# Altium PCB mini-dvm.PcbDoc
Units mil, origin at the board's own origin, x right, y up, seen from the top; angles counter-clockwise.
Board outline 1000 x 1000 mil, 4 copper layers (Top CMP/GND, Top SIG/PWR, Bottom SIG/PWR, Bottom CMP/GND), stack 29.2 mil thick; 60 components, 58 nets, 268 pads, 110 vias.
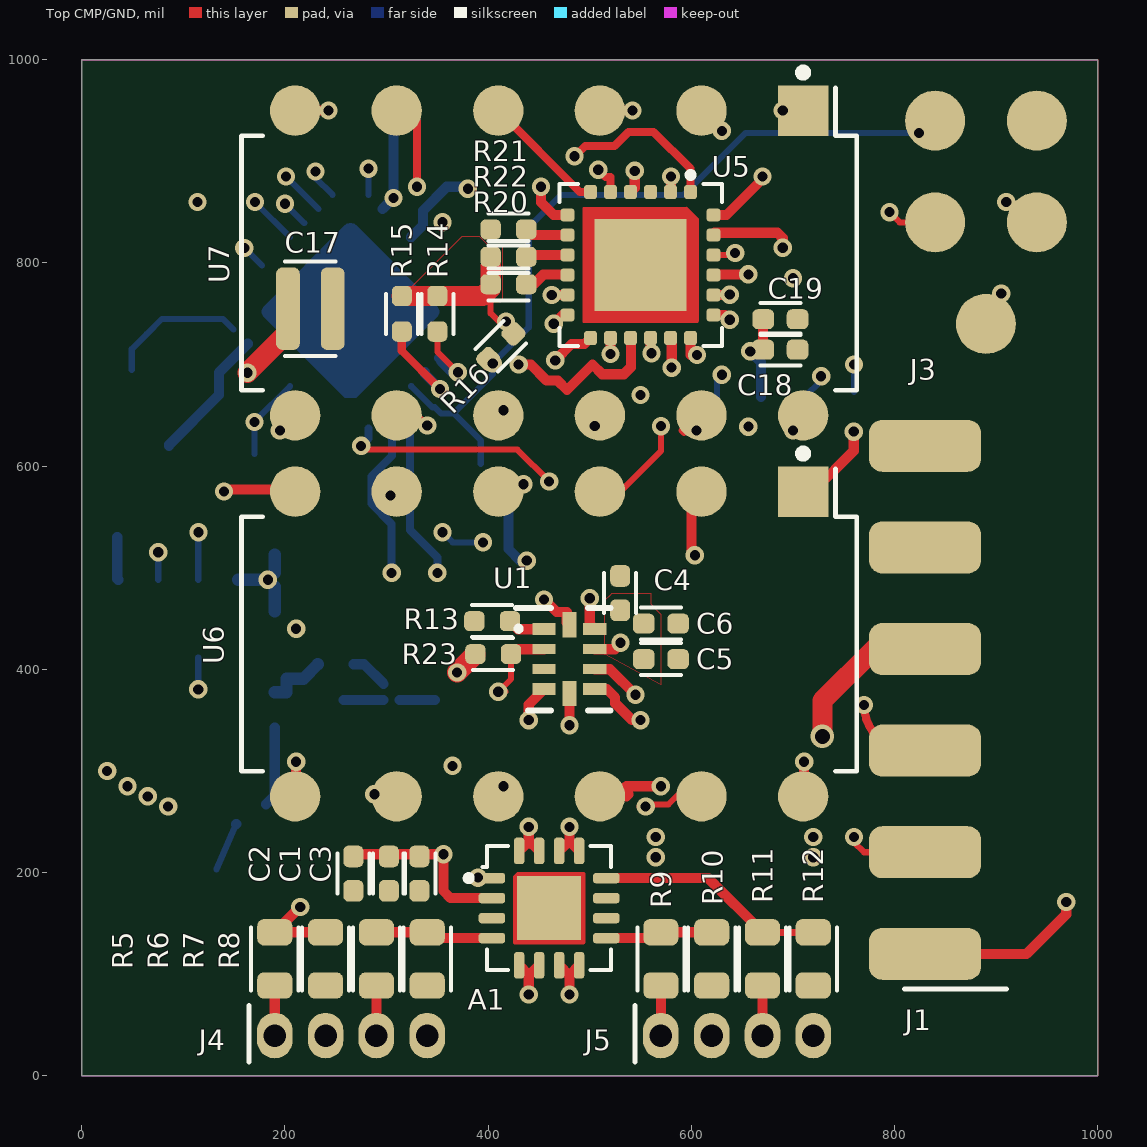
[diagram p0: Top CMP/GND view]
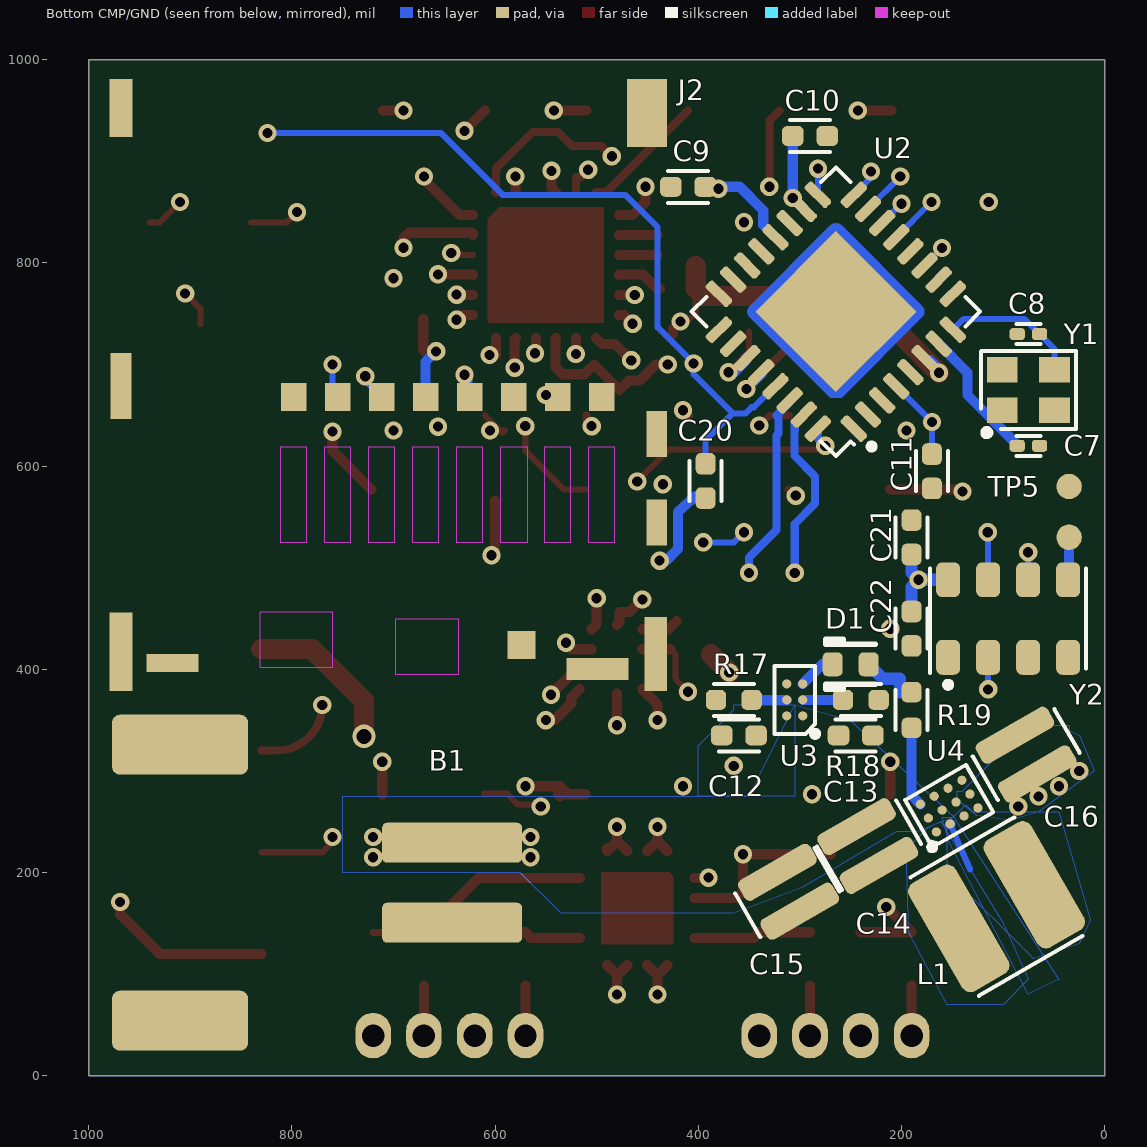
[diagram p1: Bottom CMP/GND view, seen from below]
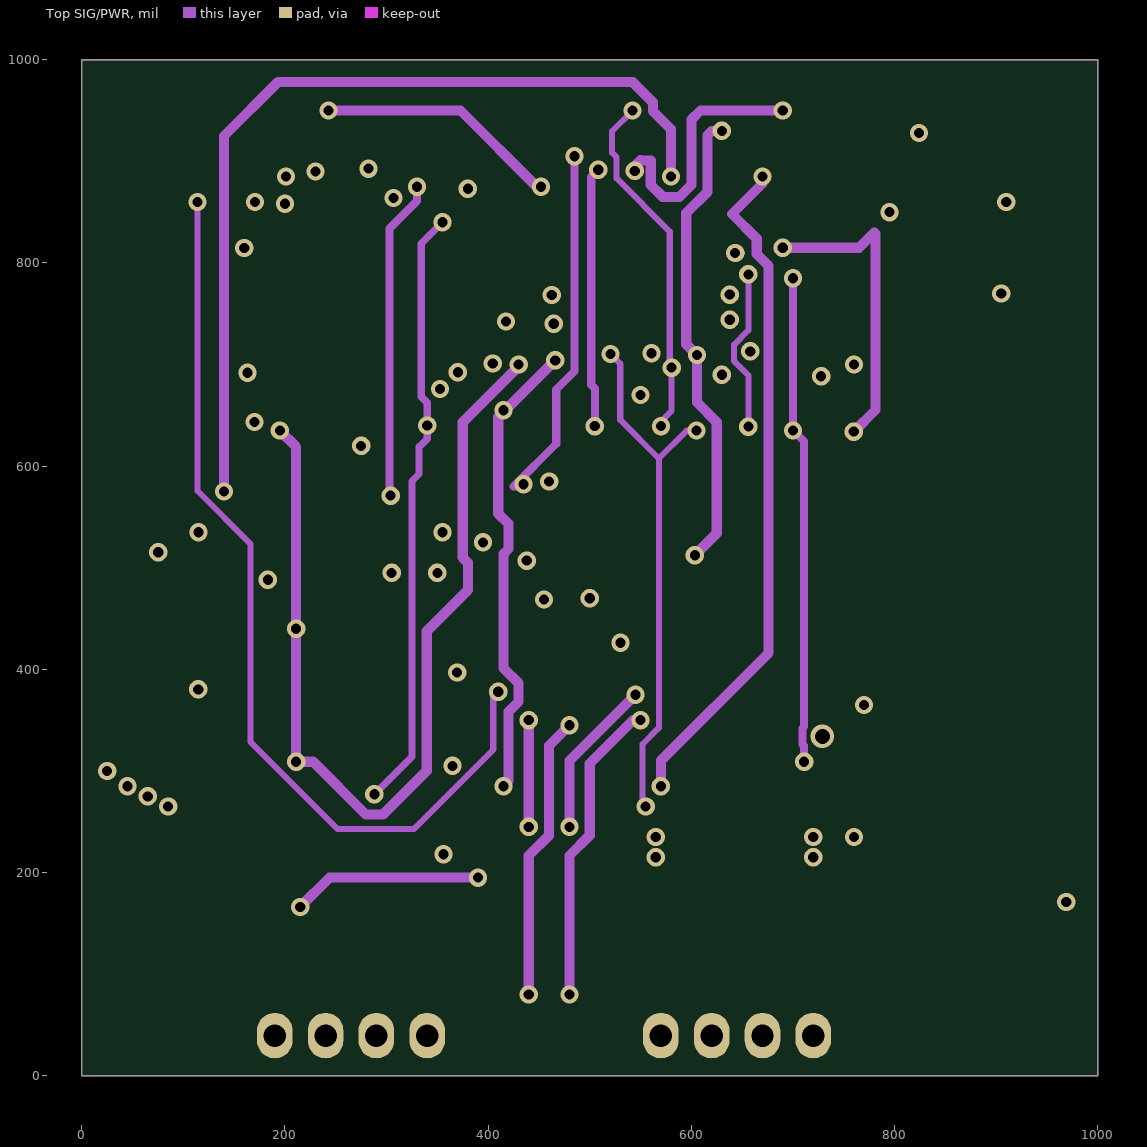
[diagram p2: Top SIG/PWR]
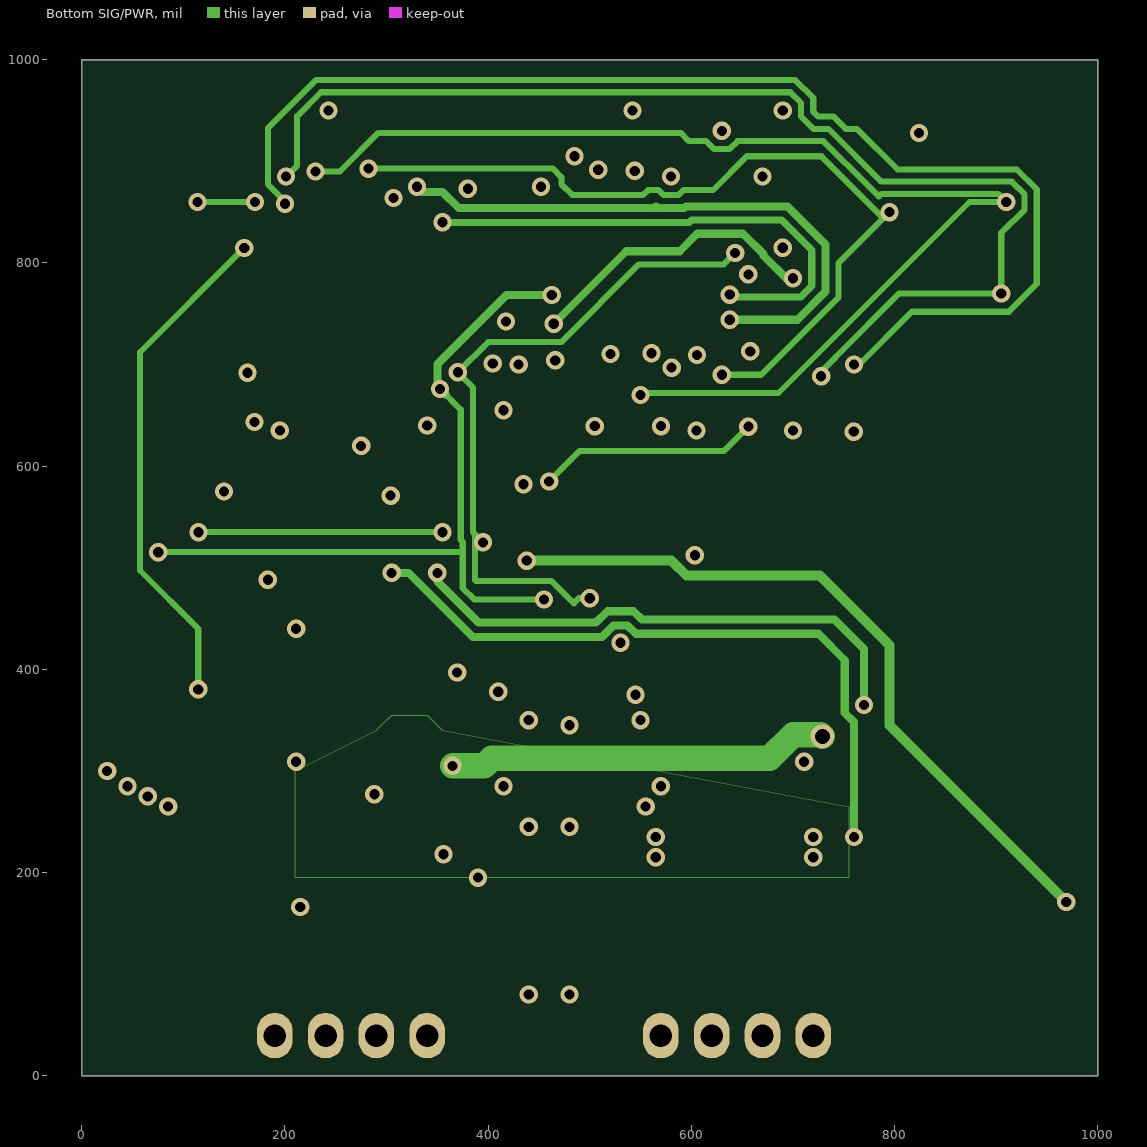
[diagram p3: Bottom SIG/PWR]

## Layer stack, top to bottom
Top Solder: solder mask 1, Solder Resist, Dk 3.5
Top CMP/GND: signal copper 1.4
Dielectric 1: core 10, FR-408, Dk 3.66
Top SIG/PWR: signal copper 0.7
Dielectric 2: prepreg 5, FR-408, Dk 3.66
Bottom SIG/PWR: signal copper 0.7
Dielectric 3: core 10, FR-408, Dk 3.66
Bottom CMP/GND: signal copper 1.4
Bottom Solder: solder mask 1, Solder Resist, Dk 3.5

## Board outline
0,0 0,1000 1000,1000 1000,0

## Design rules (kind name [scope] priority, off if disabled: settings)
Clearance PowerPolyConnect [(InNet('VBAT') OR InNet('VCC3V3') OR InNet('VCC5VUSB') OR InNet('GND'))] p1: gap=4 // Polygon Connect Style for Power Pours
Clearance [All] p2: gap=6
ComponentClearance [All] p1: gap=6 collisioncheckmode=3 verticalgap=0 showdistances=FALSE
MinimumSolderMaskSliver [All] p1: minsoldermaskwidth=3
PlaneClearance [All] p1: clearance=10
PlaneConnect [All] p1: planeconnectstyle=Relief reliefexpansion=20 reliefentries=4 reliefconductorwidth=12 reliefairgap=5
PolygonConnect [All] p1: connectstyle=Direct reliefconductorwidth=12 reliefentries=4 polygonreliefangle="90 Angle" airgapwidth=5
RoutingVias [All] p1: holewidth=10 width=18 viastyle="Through Hole" minholewidth=10 minwidth=18 maxholewidth=28 maxwidth=50
SilkToSolderMaskClearance [IsPad] p1 off: minsilkscreentomaskgap=10 clearancetoexposedcopper=TRUE
SolderMaskExpansion [All] p1: expansion=2.5
Width [All] p1: maxlimit=100 minlimit=6 preferedwidth=12 minimp=50.000000 maximp=50.000000 favimp=50.000000
25 further rules are at their usual default settings.

## Components (designator, comment, footprint, x,y, rotation, side; value= is the part's Value field where it differs from the comment)
A1 "TSU104" QFN50P300X300X100-17T180X180L 460,165 r270 top
B1 "Battery" S2B-PH-SM4 780,190 r90 bottom
C1 "10000pF" CAPC1005X50L25N 302.28,198.9 r270 top
C2 "10000pF" CAPC1005X50L25N 267.28,198.9 r270 top
C3 "0.1µF" CAPC1005X50L25N 332.28,198.9 r270 top
C4 "0.1µF" CAPC1005X50L25N 530,475 r90 top
C5 "0.1µF" CAPC1005X50L25N 570,410 r0 top
C6 "10000pF" CAPC1005X50L25N 570,445 r0 top
C7 "15pF" CAPC0603X33L15L 75,620 r180 bottom
C8 "15pF" CAPC0603X33L15L 75,730 r0 bottom
C9 "0.1µF" CAPC1005X50L25N 410,875 r0 bottom
C10 "10000pF" CAPC1005X50L25N 290,925 r180 bottom
C11 "10000pF" CAPC1005X50L25N 170,595 r270 bottom
C12 "1µF" CAPC1005X50L25N 360,335 r0 bottom
C13 "1µF" CAPC1005X50L25N 245,335 r180 bottom
C14 "10µF" CAPC1220X95L30L 233.14,226.12 r240 bottom
C15 "10µF" CAPC1220X95L30L 311.09,181.12 r240 bottom
C16 "10µF" CAPC1220X95L30L 77.26,316.12 r60 bottom
C17 "10µF" CAPC1220X95L30L 225,755 r0 top
C18 "1µF" CAPC1005X50L25N 687.57,714.62 r0 top
C19 "0.1µF" CAPC1005X50L25N 687.57,744.62 r0 top
C20 "0.1µF" CAPC1005X50L25N 392.74,585.47 r90 bottom
C21 "1µF" CAPC1005X50L25N 190,530 r90 bottom
C22 "0.1µF" CAPC1005X50L25N 190,440 r270 bottom
D1 "Green LED" SML-P11Mxxx 250,405 r180 bottom
J1 "Manufacturer Part Number 1" HEADER_6_SMT_RA 930,370 r270 top
J2 "microSD_ST11" microSD_ST11-H 705,680 r0 bottom
J3 "POGO_SPI" POGO_SPI 890,890 r0 top
J4 "Manufacturer Part Number 1" HEADER_4_RA 265,-15 r180 top
J5 "Manufacturer Part Number 1" HEADER_4_RA 645,-15 r180 top
L1 "1.5µH" INDC3030X30L90L 106.36,166.52 r150 bottom
R5 "9.09M" RESC1508X50L30L 190,115 r270 top
R6 "910k" RESC1508X50L30L 240,115 r90 top
R7 "9.09M" RESC1508X50L30L 290,115 r270 top
R8 "910k" RESC1508X50L30L 340,115 r90 top
R9 "9.09M" RESC1508X50L30L 570,115 r270 top
R10 "910k" RESC1508X50L30L 620,115 r90 top
R11 "9.09M" RESC1508X50L30L 670,115 r270 top
R12 "910k" RESC1508X50L30L 720,115 r90 top
R13 "10k" RESC1005X40L25N 403.94,447.4 r0 top
R14 "10k" RESC1005X40L25N 350,750 r90 top
R15 "10k" RESC1005X40L25N 315,750 r90 top
R16 "10k" RESC1005X40L25N 412.41,718 r45 top
R17 "680" RESC1005X40L25N 365,370 r180 bottom
R18 "10k" RESC1005X40L25N 240,370 r0 bottom
R19 "2.32k" RESC1005X40L25N 190,360 r270 bottom
R20 "75k" RESC1005X40L25N 420,779 r180 top
R21 "10k" RESC1005X40L25N 420,833 r0 top
R22 "10k" RESC1005X40L25N 420,806 r180 top
R23 "10k" RESC1005X40L25N 405,415 r180 top
TP5 "TPwGND" TPwGND 35,555 r0 bottom
U1 "ADS1115" X2QFN-10 480,410 r0 top
U2 "ATMEGA328P_32MLF" QFN50P500X500X100-33T325X325L 264.52,752 r135 bottom
U3 "bq2510xx" BGA6C40P3X2_157X88X50B23L 305,370 r90 bottom
U4 "TPS6305x" BGA12C40P4X3_168X128X62B25L 153.07,265.42 r150 bottom
U5 "AS1117" PQFN50P400X400X60-25T290X290L 550,798 r180 top
U6 "QDSP-6064" DIP762W51P254L1537H483Q12_SMT 460,425 r180 top
U7 "QDSP-6064" DIP762W51P254L1537H483Q12_SMT 460,800 r180 top
Y1 "ABM11" XTALDFN200X160X59-4L 75,675 r180 bottom
Y2 "AB-RTCMK-32" SON100P320X250X100-8L 95,450 r180 bottom

## Footprints (in the part's own frame and the unit in brackets; to place one, negate y for a bottom-side part, rotate by r counter-clockwise, add the part's x,y. Pads: shape width x height; smd on the part's side, far side on the other; paste and mask are expansions set on the pad)
BGA6C40P3X2_157X88X50B23L [mm] "Ball Grid Array (BGA), 0.40 mm pitch, rect.; 6 pin, 1.578 mm L X 0.88 mm W X 0.50 mm H body"
  round 0.23 smd mask+0.03: A1(-0.4,-0.2) A2(-0.4,0.2) B1(0,-0.2) B2(0,0.2) C1(0.4,-0.2) C2(0.4,0.2)
  silkscreen extent -0.92,-0.58 0.85,0.51, body extent -0.79,-0.44 0.79,0.44, height 0.5
BGA12C40P4X3_168X128X62B25L [mm] "Ball Grid Array (BGA), 0.40 mm pitch, rect.; 12 pin, 1.686 mm L X 1.286 mm W X 0.625 mm H body"
  round 0.23 smd mask+0.03: A1(-0.6,-0.4) A2(-0.6,0) A3(-0.6,0.4) B1(-0.2,-0.4) B2(-0.2,0) B3(-0.2,0.4) C1(0.2,-0.4) C2(0.2,0) C3(0.2,0.4) D1(0.6,-0.4) D2(0.6,0) D3(0.6,0.4)
  silkscreen extent -0.95,-0.75 0.88,0.68, body extent -0.84,-0.64 0.84,0.64, height 0.63
CAPC0603X33L15L [mm] "Capacitor, Chip; 0.60 mm L X 0.30 mm W X 0.33 mm H body"
  rrect53% 0.38x0.3 smd mask+0.05: 1(-0.28,0) 2(0.28,0)
  silkscreen extent -0.3,-0.25 0.3,0.25
CAPC1005X50L25N [mm] "Capacitor, Chip; 1.00 mm L X 0.50 mm W X 0.50 mm H body"
  rrect52% 0.54x0.5 smd: 1(-0.43,0) 2(0.43,0)
  silkscreen extent -0.5,-0.4 0.5,0.4, body extent -0.51,-0.25 0.51,0.25, height 0.5
CAPC1220X95L30L [mm] "Capacitor, Chip; 1.25 mm L X 2.00 mm W X 0.95 mm H body"
  rrect51% 0.59x2.06 smd: 1(-0.56,0) 2(0.56,0)
  silkscreen extent -0.63,-1.18 0.63,1.18, body extent -0.63,-1 0.64,1, height 0.6
DIP762W51P254L1537H483Q12_SMT [mm] "DIP, 7.62 mm lead span, 2.54 mm pitch; 12 pin, 15.37 mm L X 6.35 mm W X 4.83 mm H body"
  rect 1.26x1.26 smd paste-1.26: 1(-6.35,-3.81)
  round 1.26 smd paste-1.26: 2(-3.81,-3.81) 3(-1.27,-3.81) 4(1.27,-3.81) 5(3.81,-3.81) 6(6.35,-3.81) 7(6.35,3.81) 8(3.81,3.81) 9(1.27,3.81) 10(-1.27,3.81) 11(-3.81,3.81) 12(-6.35,3.81)
  silkscreen extent -7.69,-4.86 7.69,3.18
HEADER_4_RA [mm]
  oval 0.89x1.14 hole 0.56: 1(1.905,-1.385) 2(0.635,-1.385) 3(-0.635,-1.385) 4(-1.905,-1.385)
  silkscreen extent 2.55,-2.14 2.55,-0.72, body extent -3.12,-1.63 3.12,4.5, height 3.02
HEADER_6_SMT_RA [mm]
  rrect50% 1.3x2.8 smd: 1(6.35,-2.54) 2(3.81,-2.54) 3(1.27,-2.54) 4(-1.27,-2.54) 5(-3.81,-2.54) 6(-6.35,-2.54)
  silkscreen extent 7.22,-3.05 7.22,-0.51, body extent -7.62,-3.47 7.62,7.63, height 2.5
INDC3030X30L90L [mm] "Inductor, Chip; 3.00 mm L X 3.00 mm W X 0.30 mm H body"
  rrect37% 1.34x3.12 smd: 1(-1.09,0) 2(1.09,0)
  silkscreen extent -1.5,-1.71 1.5,1.71, body extent -1.5,-1.5 1.5,1.5, height 1.4
microSD_ST11-H [mm]
  rect 0.64x0.7 smd: 1(2.37,0.3) 2(1.27,0.3) 3(0.17,0.3) 4(-0.93,0.3) 5(-2.03,0.3) 6(-3.13,0.3) 7(-4.23,0.3) 8(-5.33,0.3)
  rect 1.55x0.55 smd: 9(-5.225,7.102)
  rect 0.7x0.7 smd: 10(-3.33,6.5)
  rect 0.57x1.45 smd: 11(6.685,-6.925)
  rect 0.52x1.65 smd: 12(6.685,0.03)
  rect 0.57x1.96 smd: 13(6.685,6.67)
  rect 0.57x1.85 smd: 14(-6.685,6.725)
  rect 0.52x1.15 smd: 15(-6.71,3.44) 16(-6.71,1.23)
  rect 1.01x1.7 smd: 17(-6.465,-6.8)
  rect 1.3x0.45 smd: 18(5.4,6.955)
  Top CMP/GND keep-out region: -1.75,7.25 -0.19,7.25 -0.19,5.85 -1.75,5.85
  Top CMP/GND keep-out region: 1.4,7.07 3.2,7.07 3.2,5.67 1.4,5.67
  Top CMP/GND keep-out region: -5.65,3.95 -5.01,3.95 -5.01,1.55 -5.65,1.55
  Top CMP/GND keep-out region: -4.55,3.95 -3.91,3.95 -3.91,1.55 -4.55,1.55
  Top CMP/GND keep-out region: -3.475,3.95 -2.81,3.95 -2.81,1.55 -3.475,1.55
  Top CMP/GND keep-out region: -0.15,3.95 0.49,3.95 0.49,1.55 -0.15,1.55
  Top CMP/GND keep-out region: -2.35,3.95 -1.71,3.95 -1.71,1.55 -2.35,1.55
  Top CMP/GND keep-out region: -1.25,3.95 -0.61,3.95 -0.61,1.55 -1.25,1.55
  Top CMP/GND keep-out region: 0.95,3.95 1.59,3.95 1.59,1.55 0.95,1.55
  Top CMP/GND keep-out region: 2.05,3.95 2.69,3.95 2.69,1.55 2.05,1.55
  body extent -6.7,-7.65 6.7,7.65, height 1.22
POGO_SPI [mm]
  round 1.5 smd: 1(-1.27,1.27) 2(-1.27,-1.27) 3(0,-3.81) 4(1.27,-1.27) 5(1.27,1.27)
PQFN50P400X400X60-25T290X290L [mm] "Pullback Quad Flat No-Lead (PQFN with Tab), 0.50 mm pitch; square, 6 pin X 6 pin, 4.00 mm L X 4.00 mm W X 0.60 mm H body"
  rrect48% 0.33x0.35 smd: 1(-1.25,-1.825) 2(-0.75,-1.825) 3(-0.25,-1.825) 4(0.25,-1.825) 5(0.75,-1.825) 6(1.25,-1.825) 13(1.25,1.825) 14(0.75,1.825) 15(0.25,1.825) 16(-0.25,1.825) 17(-0.75,1.825) 18(-1.25,1.825)
  rrect48% 0.35x0.33 smd: 7(1.825,-1.25) 8(1.825,-0.75) 9(1.825,-0.25) 10(1.825,0.25) 11(1.825,0.75) 12(1.825,1.25) 19(-1.825,1.25) 20(-1.825,0.75) 21(-1.825,0.25) 22(-1.825,-0.25) 23(-1.825,-0.75) 24(-1.825,-1.25)
  rect 2.3x2.3 smd paste-2.3 mask+0: 25(0,0)
  Top CMP/GND region: 1.45,0 1.45,-1.4 1.449,-1.408 1.448,-1.415 1.445,-1.423 1.441,-1.429 1.435,-1.435 1.429,-1.441 1.423,-1.445 1.415,-1.448 1.408,-1.449 -1.15,-1.45 -1.45,-1.15 -1.45,1.4 -1.449,1.408 -1.448,1.415 -1.445,1.423 -1.441,1.429 -1.435,1.435 -1.429,1.441 -1.423,1.445 -1.415,1.448 -1.408,1.449 1.4,1.45 1.408,1.449 1.415,1.448 1.423,1.445 1.429,1.441 1.435,1.435 1.441,1.429 1.445,1.423 1.448,1.415 1.449,1.408 1.45,1.4 1.45,0
  silkscreen extent -2.03,-2.32 2.03,2.03, body extent -2,-2 2,2, height 0.9
QFN50P300X300X100-17T180X180L [mm] "Quad Flat No-Lead (QFN with Tab), 0.50 mm pitch; square, 4 pin X 4 pin, 3.00 mm L X 3.00 mm W X 1.00 mm H body"
  rrect54% 0.26x0.66 smd: 1(-0.75,-1.43) 2(-0.25,-1.43) 3(0.25,-1.43) 4(0.75,-1.43) 9(0.75,1.43) 10(0.25,1.43) 11(-0.25,1.43) 12(-0.75,1.43)
  rrect54% 0.66x0.26 smd: 5(1.43,-0.75) 6(1.43,-0.25) 7(1.43,0.25) 8(1.43,0.75) 13(-1.43,0.75) 14(-1.43,0.25) 15(-1.43,-0.25) 16(-1.43,-0.75)
  rect 1.6x1.6 smd paste-1.6 mask+0: 17(0,0)
  Top CMP/GND region: 0.9,0 0.9,-0.85 0.899,-0.858 0.898,-0.865 0.895,-0.873 0.89,-0.879 0.885,-0.885 0.879,-0.891 0.873,-0.895 0.865,-0.898 0.858,-0.899 -0.8,-0.9 -0.9,-0.8 -0.9,0.85 -0.899,0.858 -0.898,0.865 -0.895,0.873 -0.891,0.879 -0.885,0.885 -0.879,0.891 -0.873,0.895 -0.866,0.898 -0.858,0.899 0.85,0.9 0.858,0.899 0.865,0.898 0.873,0.895 0.879,0.891 0.885,0.885 0.89,0.879 0.895,0.873 0.898,0.865 0.899,0.858 0.9,0.85 0.9,0
  silkscreen extent -1.55,-2.08 1.55,1.55, body extent -1.5,-1.5 1.5,1.5, height 0.92
QFN50P500X500X100-33T325X325L [mm] "Quad Flat No-Lead (QFN with Tab), 0.50 mm pitch; square, 8 pin X 8 pin, 5.00 mm L X 5.00 mm W X 1.00 mm H body"
  rrect54% 0.26x0.76 smd: 1(-1.75,-2.385) 2(-1.25,-2.385) 3(-0.75,-2.385) 4(-0.25,-2.385) 5(0.25,-2.385) 6(0.75,-2.385) 7(1.25,-2.385) 8(1.75,-2.385) 17(1.75,2.385) 18(1.25,2.385) 19(0.75,2.385) 20(0.25,2.385) 21(-0.25,2.385) 22(-0.75,2.385) 23(-1.25,2.385) 24(-1.75,2.385)
  rrect54% 0.76x0.26 smd: 9(2.385,-1.75) 10(2.385,-1.25) 11(2.385,-0.75) 12(2.385,-0.25) 13(2.385,0.25) 14(2.385,0.75) 15(2.385,1.25) 16(2.385,1.75) 25(-2.385,1.75) 26(-2.385,1.25) 27(-2.385,0.75) 28(-2.385,0.25) 29(-2.385,-0.25) 30(-2.385,-0.75) 31(-2.385,-1.25) 32(-2.385,-1.75)
  rect 2.85x2.85 smd paste-2.85 mask+0: 33(0,0)
  Top CMP/GND region: 1.625,-1.425 1.623,-1.456 1.615,-1.487 1.603,-1.516 1.587,-1.543 1.566,-1.566 1.543,-1.587 1.516,-1.603 1.487,-1.615 1.456,-1.622 -1.425,-1.625 -1.625,-1.425 -1.625,1.425 -1.623,1.456 -1.615,1.487 -1.603,1.516 -1.587,1.543 -1.566,1.566 -1.543,1.587 -1.516,1.603 -1.487,1.615 -1.456,1.623 1.425,1.625 1.456,1.623 1.487,1.615 1.516,1.603 1.543,1.587 1.566,1.566 1.587,1.543 1.603,1.516 1.615,1.487 1.623,1.456 1.625,1.425
  silkscreen extent -2.55,-3.09 2.55,2.55, body extent -2.54,-2.54 2.54,2.54, height 1
RESC1005X40L25N [mm] "Resistor, Chip; 1.00 mm L X 0.50 mm W X 0.40 mm H body"
  rrect52% 0.51x0.5 smd: 1(-0.445,0) 2(0.445,0)
  silkscreen extent -0.5,-0.4 0.5,0.4, body extent -0.51,-0.25 0.51,0.25, height 0.37
RESC1508X50L30L [mm] "Resistor, Chip; 1.575 mm L X 0.85 mm W X 0.50 mm H body"
  rrect52% 0.66x0.88 smd: 1(-0.665,0) 2(0.665,0)
  silkscreen extent -0.79,-0.59 0.79,0.59, body extent -0.83,-0.48 0.83,0.48, height 0.5
S2B-PH-SM4 [mm] "2-pin JST PH side-entry SMT"
  rrect25% 1x3.5 smd: 1(1,-3.5) 2(-1,-3.5)
  rrect25% 1.5x3.4 smd: 3(-3.45,3.3) 4(3.45,3.3)
  body extent -3.9,-4.3 4,4.3, height 5.5
SML-P11Mxxx [mm]
  rrect50% 0.5x0.6 smd paste-0.18: 1(0.45,0) 2(-0.45,0)
  silkscreen extent -0.63,-0.63 0.63,0.63, body extent -0.5,-0.3 0.5,0.3, height 0.2
SON100P320X250X100-8L [mm] "Small Outline No-Lead (SON), 1.00 mm pitch; 8 pin, 3.20 mm L X 2.50 mm W X 1.00 mm H body"
  rrect50% 0.6x0.87 smd: 1(-1.5,-0.97) 2(-0.5,-0.97) 3(0.5,-0.97) 4(1.5,-0.97) 5(1.5,0.97) 6(0.5,0.97) 7(-0.5,0.97) 8(-1.5,0.97)
  silkscreen extent -1.95,-1.73 1.95,1.25, body extent -1.6,-1.26 1.6,1.24, height 1.01
TPwGND [mil]
  round 25 smd: 1(0,25) 2(0,-25)
X2QFN-10 [mm]
  rect 0.58x0.3 smd paste-0.15: 1(-0.635,0.75) 4(-0.635,-0.75) 6(0.635,-0.75) 9(0.635,0.75)
  rect 0.58x0.25 smd: 2(-0.635,0.25) 3(-0.635,-0.25) 7(0.635,-0.25) 8(0.635,0.25)
  rect 0.35x0.63 smd: 5(0,-0.86) 10(0,0.86)
  silkscreen extent -1.33,-1.28 1.03,1.28, body extent -0.77,-1.02 0.77,1.02, height 0.37
XTALDFN200X160X59-4L [mm] "Crystal, Dual Flat No-Lead (DFN 4 Pins), 1.31 mm pitch; 4 pin, 2.00 mm L X 1.60 mm W X 0.59 mm H body"
  rect 0.77x0.63 smd: 1(-0.655,-0.505) 2(0.655,-0.505) 3(0.655,0.505) 4(-0.655,0.505)
  silkscreen extent -1.19,-1.1 1.19,0.97, body extent -1,-0.79 1,0.81, height 0.59

## Part data
A1: library part TSU104IQ4T, "IC OPAMP 5V CMOS NANOPWR 16QFN"
B1: library part S2B-PH-SM4-TB(LF)(SN), "CONN HEADER PH SIDE 2POS 2MM SMD"
C1 C2 C6 C10 C11: library part GRM155R71H103KA88D, "CAP CER 10000PF 50V X7R 0402"
C3 C4 C5 C9 C19 C20 C22: library part GRM155R71H104KE14D, "CAP CER 0.1UF 50V X7R 0402"
C7 C8: library part GJM0335C1E150GB01D, "CAP CER 15PF 25V NP0 0201"
C12 C13 C18 C21: library part GRM155R70J105KA12D, "CAP CER 1UF 6.3V X7R 0402"
C14 C15 C16 C17: library part JWK212C6106MD-T, "CAP CER 10UF 6.3V X6S 0508"
D1: library part SML-P11MTT86, "LED GREEN CLEAR 0402 SMD"
J1: library part 961106-5500-AR-PR, "CONN HEADER R/A 6POS GOLD SMD"
J2: library part ST11S008V4HR2000, "CONN MICRO SD CARD PUSH-PUSH R/A"
J3: "5-pin SPI ISP pogo land with RST + GND"
J4 J5: library part 5-104186-1, "CONN HEADER 4POS R/A GOLD T/H"
L1: library part LQH3NPN1R5MJRL, "FIXED IND 1.5UH 1.1A 49 MOHM SMD"
R5 R7 R9 R11: library part CRCW06039M09FKEA, "RES SMD 9.09M OHM 1% 1/10W 0603"
R6 R8 R10 R12: library part CRCW0603910KFKEA, "RES SMD 910K OHM 1% 1/10W 0603"
R13 R14 R15 R16 R18 R21 R22 R23: library part CRCW040210K0JNED, "RES SMD 10K OHM 5% 1/16W 0402"
R17: library part ERJ-2RKF6800X, "RES SMD 680 OHM 1% 1/10W 0402"
R19: library part ERJ-2RKF2321X, "RES SMD 2.32K OHM 1% 1/10W 0402"
R20: library part ERJ-2RKF7502X, "RES SMD 75K OHM 1% 1/10W 0402"
U1: library part ADS1115IRUGT, "IC ADC 16-BIT I2C PROGBL 10-QFN"
U2: library part ATMEGA328P-MUR, "IC MCU 8BIT 32KB FLASH 32QFN"
U3: library part BQ25101YFPR, "IC LI-ION CHARGE MGMT 6DSBGA"
U4: library part TPS63051YFFR, "IC REG BCK BST 3.3V 0.5A 12DSBGA"
U5: library part AS1117-BQFT, "IC DRIVER 64LED MOBILE 24-TQFN"
U6 U7: "HP 4-Digit LED 7-Segment Bubble Display"
Y1: library part ABM11-16.000MHZ-B7G-T, "CRYSTAL 16.0000MHZ 10PF SMD"
Y2: library part AB-RTCMK-32.768KHZ-T3, "IC RTC CLK/CALENDAR I2C 8-SMT"

## Via types
v1: diameter 18, hole 10, Top CMP/GND to Bottom CMP/GND, tented both sides, 104 vias
v2: diameter 18, hole 10, Top CMP/GND to Bottom CMP/GND, 5 vias
v3: diameter 23, hole 15, Top CMP/GND to Bottom CMP/GND, tented both sides, 1 vias

## Nets (pads, with @x,y where several pads share a name; then routed paths per layer and width w, separated by ;. In a path a pad name is that pad's centre, name@x,y a point inside that pad or via, vN(x,y) a via of type N, cw(c..) or ccw(c..) an arc to the next point about the centre after c; other vN are vias at no path point)
DTR_RST: C20.1 J1.1 | length 972.7
  Top CMP/GND w10: J1.1 930,120 969,159 v1(969,171)
  Bottom SIG/PWR w10: v1(438,507) 580.47,507 595.14,492.33 726.47,492.33 795,423.8 795,345 v1(969,171)
  Bottom CMP/GND w10: C20.1@395.99,570.53 402.49,570.53 420,555 420,518.38 431.38,507 v1(438,507)
GND: A1.3 A1.10 A1.11 A1.17 B1.2 C1.2 C2.2 C3.2 C4.2 C5.2 C6.2 C7.2 C8.2 C9.2 C10.2 C11.2 C12.2 C13.2 C14.2 C15.2 C16.2 C17.2 C18.2 C19.2 C21.2 C22.2 J1.6 J2.6 J2.11 J2.12 J2.13 J2.14 J2.15 J2.16 J2.17 J2.18 J3.5 J4.2 J4.4 J5.2 J5.4 R6.1 R8.1 R10.1 R12.1 R13.1 R17.1 R18.1 R21.1 TP5.2 U1.3 U2.3 U2.5 U2.21 U2.33 U3.C2 U4.B1 U4.B3 U4.C2 U5.3 U5.25 Y1.2 Y1.4 Y2.1 Y2.4 | length 48.6
  Bottom CMP/GND w6: 132.58,203.25 U4.B1@151.88,247.59
  Bottom CMP/GND w10: U4.B1@151.88,247.59 U4.B1
IN_0_BUF: A1.15 A1.16 U1.4 | length 183.7
  Top CMP/GND w10: A1.16 440,230.83 440,231.46 ; v1(440,245) 440,231.46 ; v1(440,350) 440,365.47 U1.4 ; A1.15 440,231.46
  Top SIG/PWR w10: v1(440,245) v1(440,350)
IN_0_SCALED: A1.1 R5.1 R6.2 | length 293
  Top CMP/GND w10: v1(215,166.18) R5.1 R6.2 ; v1(390,195) 387.05,195 386.57,194.53 A1.1
  Top SIG/PWR w10: v1(215,166.18) 243.82,195 v1(390,195)
IN_1_BUF: A1.5 A1.6 U1.5 | length 359.7
  Top CMP/GND w10: A1.5 440,99.17 440,98.54 ; v1(440,80) 440,98.54 ; A1.6 440,98.54 ; v1(480,345) U1.5
  Top SIG/PWR w10: v1(440,80) 440,216.72 460,236.72 460,325 v1(480,345)
IN_1_SCALED: A1.4 R7.1 R8.2 | length 116.1
  Top CMP/GND w10: R7.1 R8.2 345.71,135.47 A1.4
IN_2_BUF: A1.7 A1.8 U1.6 | length 399.4
  Top CMP/GND w10: A1.7 480,98.54 ; v1(480,80) 480,98.54 ; A1.8 480,99.17 480,98.54 ; 516.9,380.47 525,372.37 525,366.72 541.72,350 v1(550,350)
  Top SIG/PWR w10: v1(480,80) 480,216.72 500,236.72 500,307.37 542.63,350 v1(550,350)
IN_2_SCALED: A1.9 R9.1 R10.2 | length 106.1
  Top CMP/GND w10: A1.9 564.29,135.47 R9.1 R10.2
IN_3_BUF: A1.13 A1.14 U1.7 | length 251.8
  Top CMP/GND w10: A1.14 480,231.46 ; v1(480,245) 480,231.46 ; A1.13@489.53,223.76 A1.13 480,230.83 480,231.46 ; U1.7 519.84,400.16 v1(545,375)
  Top SIG/PWR w10: v1(480,245) 480,310 v1(545,375)
IN_3_SCALED: A1.12 R11.1 R12.2 | length 225.8
  Top CMP/GND w7: R11.1 R12.2
  Top CMP/GND w10: A1.12 616.65,194.53 R11.1
MCU_SCL: R15.1 U1.10 U2.28 U5.11 Y2.6 | length 944.7
  Top CMP/GND w8: R15.1 315,713.62 v1(352.62,676)
  Top CMP/GND w10: v1(455,468.86) 467.43,456.43 477.42,456.43 477.42,446.44 U1.10 ; v1(462.56,768.47) U5.11
  Top SIG/PWR w10: v1@461.39,768.47 v1(462.56,768.47)
  Bottom SIG/PWR w6: v1(75.31,515.31) 373.31,515.31 375,517 ; v1(352.62,676) 373,655.62 373,527.54 375,525.54 375,517 ; v1(455,468.86) 386.14,468.86 375,480 375,517
  Bottom SIG/PWR w8: v1@358.62,670 350.21,678.41 350.21,700.63 418.05,768.47 v1(462.56,768.47)
  Bottom CMP/GND w6: Y2.6 v1(75.31,515.31)
  Bottom CMP/GND w10: U2.28 337.88,690.75 v1(352.62,676)
MCU_SDA: R14.1 U1.9 U2.27 U5.22 Y2.7 | length 1138.4
  Top CMP/GND w6: R14.1 350,712.56 v1(370.21,692.35) ; U5.22 641.21,807.84 v1(643.08,809.72)
  Top CMP/GND w10: v1(500,470) 500,444.53 U1.9
  Top SIG/PWR w6: v1(643.08,809.72) v1@649.72,809.72
  Bottom SIG/PWR w6: v1(115,535) v1(355,535) ; v1(395,525) 385,535 ; v1(500,470) 489.31,470 484.31,465 462.46,486.86 388.14,486.86 387,488 387,533 385,535 ; v1(643.08,809.72) 631.91,798.54 548.41,798.54 472.02,722.16 400.02,722.16 v1(370.21,692.35) 385,677.56 385,535
  Bottom CMP/GND w6: Y2.7 114.69,534.69 v1(115,535) ; v1(355,535) 365,525 v1(395,525)
  Bottom CMP/GND w10: U2.27 353.52,706.48 353.52,703.39 364.56,692.35 v1(370.21,692.35)
MISO: J2.7 J3.4 U2.16 | length 1242.1
  Top CMP/GND w6: v1(910,860) 930,840 J3.4
  Bottom SIG/PWR w6: v1(230,890) 253.94,890 291.94,928 589.58,928 597.58,920 614.54,920 622.54,912 637.46,912 645.46,920 730,920 775,875 775,874.94 784.48,865.46 787.01,868 902,868 v1(910,860) 873.76,860 685.76,672 552,672 v1(550,670)
  Bottom CMP/GND w6: v1(230,890) 230,883.96 U2.16 ; J2.7@548.19,668.19 v1(550,670)
MOSI: J2.3 J3.3 U2.15 | length 1274.1
  Top CMP/GND w6: J3.3 890,755 v1(905,770)
  Bottom SIG/PWR w6: v1(201.12,885) 212,895.88 212,944.54 235.46,968 697.46,968 708,957.46 708,944.04 720.04,932 734.97,932 786.97,880 915.46,880 928,867.46 928,852.54 905,829.54 v1(905,770) 804.54,770 742,707.46 742,707 723.54,688.54 v1(727.76,688.54)
  Bottom CMP/GND w6: v1(201.12,885) U2.15 ; J2.3 727.76,684.25 v1(727.76,688.54)
NetC7_1: C7.1 U2.7 Y1.1 | length 132.4
  Bottom CMP/GND w10: C7.1 86.02,621.02 135,670 135,692.08 U2.7
NetC8_1: C8.1 U2.8 Y1.3 | length 137.3
  Bottom CMP/GND w6: Y1.3 49.21,715.24 C8.1 78.98,745 138.73,745 U2.8
NetD1_1: D1.1 R19.1 | length 61.5
  Bottom CMP/GND w12: R19.1 201.44,377.52 201.44,390.84 218.13,390.84 D1.1
NetD1_2: D1.2 U3.C1 | length 37.4
  Bottom CMP/GND w10: D1.2 277.87,405 U3.C1
NetJ4_1: J4.1 R5.2 | length 49.3
  Top CMP/GND w10: J4.1 R5.2
NetJ4_3: J4.3 R7.2 | length 49.3
  Top CMP/GND w10: J4.3 R7.2
NetJ5_1: J5.1 R9.2 | length 49.3
  Top CMP/GND w10: J5.1 R9.2
NetJ5_3: J5.3 R11.2 | length 49.3
  Top CMP/GND w10: J5.3 R11.2
NetL1_1: L1.1 U4.A1
NetL1_2: L1.2 U4.C1
NetR13_2: R13.2 U1.1 | length 36.8
  Top CMP/GND w10: R13.2 429.33,439.53 U1.1
NetR17_2: R17.2 U3.B2 | length 34.6
  Bottom CMP/GND w10: U3.B2 R17.2
NetR18_2: R18.2 U3.B1 | length 40
  Bottom CMP/GND w6: U3.B1@296.87,369.75 U3.B1
  Bottom CMP/GND w10: R18.2 257.52,369.75 290.66,369.75 U3.B1@296.87,369.75
NetR20_1: R20.1 U5.10 | length 46.5
  Top CMP/GND w10: R20.1@437.52,775 440.8,775 454.27,788.47 478.15,788.47 U5.10
NetR21_2: R21.2 U5.8 | length 38.2
  Top CMP/GND w10: R21.2@439.99,827.53 U5.8
NetR22_1: R22.1 U5.9 | length 37.8
  Top CMP/GND w10: R22.1@440.36,807.84 U5.9
NetR23_1: R23.1 U1.2 U2.13 | length 1101.2
  Top CMP/GND w6: v1@417,378.2 416.8,378 v1(410,378) 422.52,390.52 R23.1
  Top CMP/GND w10: R23.1@427.36,419.84 U1.2
  Top SIG/PWR w6: v1(114,860) 114,575.54 166.19,523.36 166.19,328.36 251.54,243 327.04,243 405,320.96 405,366 405,373 v1(410,378)
  Bottom SIG/PWR w6: v1(114,860) v1(170.44,860)
  Bottom CMP/GND w6: v1(170.44,860) U2.13
NetTP5_1: TP5.1 Y2.5 | length 42.2
  Bottom CMP/GND w10: TP5.1 35,489.13 Y2.5
NetU2_32: U2.32 U5.21 | length 634.2
  Top CMP/GND w6: v1(275,620) 278.8,616.2 428.8,616.2 v1(460,585)
  Top CMP/GND w10: U5.21 621.85,788.79 v1(656.09,788.79)
  Top SIG/PWR w6: v1(656.09,638.91) 656.09,689.36 642,703.46 642,719.63 656.09,733.72 v1(656.09,788.79)
  Bottom SIG/PWR w6: v1(460,585) 490,615 632.19,615 v1(656.09,638.91)
  Bottom CMP/GND w8: v1(275,620) 282.2,627.2 U2.32
NetU5_1: U5.1 U6.4 | length 523.8
  Top CMP/GND w8: v1(485,905) 485.39,905 495.58,915.2 524.42,915.2 538.22,929 562.87,929 599,892.87 599,869.85 U5.1
  Top CMP/GND w10: U5.1 U5.1@599.21,870.87
  Top SIG/PWR w8: v1(434.84,582.2) 432.64,580 425,580 467,622 467,675.38 485,693.38 v1(485,905)
NetU5_2: U5.2 U6.6 | length 969.4
  Top CMP/GND w10: v1(140,575) 142,577 U6.6@211,577 ; U5.2@580,870.32 v1(580,885)
  Top SIG/PWR w10: v1(140,575) 140,925 193,978 542.41,978 562.13,958.28 562.13,949.63 580,931.76 v1(580,885)
NetU5_4: U5.4 U7.1 | length 297.1
  Top CMP/GND w10: U5.4 544.35,874.04 v1(544.35,890.65) ; v1(690,950) U7.1
  Top SIG/PWR w10: v1(544.35,890.65) 544.35,895.37 550,901.03 550.16,900.87 559.84,900.87 560,900.71 560,876.72 571.72,865 588.28,865 600,876.72 600,941.03 608.97,950 v1(690,950)
NetU5_5: U5.5 U7.10 | length 289
  Top CMP/GND w8: v1(504.91,639.41) 510,644.5 U7.10 ; 515.56,884.53 520.47,884.53 U5.5
  Top SIG/PWR w8: v1(504.91,639.41) 505,639.5 505,676.38 501.47,679.91 501.47,884.87 v1(508.35,891.74)
NetU5_6: U5.6 U7.4 | length 124
  Top CMP/GND w8: U7.4 490.15,869.85 U5.6
NetU5_7: U5.7 U7.6 | length 319.6
  Top CMP/GND w10: U7.6 v1(242.91,950) ; v1(452,875) 452,859.78 464.57,847.21 U5.7
  Top SIG/PWR w10: v1(242.91,950) 372.83,950 447.83,875 v1(452,875)
NetU5_12: U5.12 U6.12 U7.12 | length 830.4
  Top CMP/GND w10: v1(464.57,740.16) 473.2,748.79 U5.12 ; U6.12@711,277 v1(711,309)
  Top SIG/PWR w8: v1(700,635) v1(700,785) ; v1@700,643.31 700,635.5 711,624.5 711,343.58 709.5,342.08 709.5,325.92 711,324.42 v1(711,309)
  Bottom SIG/PWR w8: v1(464.57,740.16) 535.95,811.54 588.57,811.54 605.74,828.72 650.95,828.72 671,808.67 671,807.13 693.13,785 v1(700,785)
NetU5_13: U5.13 U6.9 U7.9 | length 504.3
  Top CMP/GND w10: U7.9 v1(415,655) ; v1(466,704.16) 482,720.16 494.8,720.16 U5.13
  Top SIG/PWR w10: v1@410,648.28 410,553.28 420,543.28 420,518.43 415,513.43 415,401.28 430,386.28 430,368.28 420,358.28 420,290 v1(415,285) ; v1(415,655) 416.72,655 456.72,695 456.84,695 v1(466,704.16)
NetU5_14: U5.14 U6.11 U7.11 | length 657.4
  Top CMP/GND w6: v1(520.47,710.47) v1@522.91,708.04 ; v1(555,265) 549,265 551,267 577.46,267 588,277.54 588,278 611,278 U6.11@611,277 ; v1(605,635) 590.46,635 592.73,632.73 U7.11
  Top CMP/GND w10: v1(520.47,710.47) U5.14
  Top SIG/PWR w6: v1(520.47,710.47) 530,700.94 530,645.54 568,607.54 ; v1(555,265) 552,268 552,326.54 568,342.54 568,600 568,607.54 ; v1(605,635) 595.46,635 568,607.54
NetU5_15: U5.15 U6.7 U7.7 | length 1140.9
  Top CMP/GND w10: U6.7@211,277 v1(211,309) ; v1(430,700) 441.87,700 457.72,684.16 468.5,684.16 477.66,675 502.66,700 512.19,690.47 533.54,690.47 540.47,697.41 540.47,725.83 U5.15
  Top SIG/PWR w10: v1(195,635) 211,619 v2(211,440) v1(211,309) 227.72,309 279.72,257 296.28,257 339.5,300.22 339.5,437.5 380,478 380,505 375,510 375,643.28 430,698.28 v1(430,700)
NetU5_17: U5.17 U6.3 U7.3 | length 512.5
  Top CMP/GND w6: U6.3@511,577 532,577 570.2,615.2 v1(570.2,639.41)
  Top CMP/GND w10: U7.3 v1(542.13,950) ; U5.17 580.75,724.93 580.75,697.13 v1(580.59,696.97)
  Top SIG/PWR w6: v1(542.13,950) 522,929.87 522,908.46 526.35,904.11 526.35,898.11 526.35,883.2 578.75,830.79 v1@578.75,698.81 ; v1(570.2,639.41) 565.59,639.41 580.59,654.41 v1(580.59,696.97)
NetU5_18: U5.18 U6.2 U7.2 | length 566.2
  Top CMP/GND w10: U5.18 599.21,709.45 v1(605.51,709.45) ; U6.2@600,566 600,515.76 v1(603.43,512.33) ; U7.2 v1(630,930)
  Top SIG/PWR w10: v1(603.43,512.33) 625,533.9 625,643.28 605.51,662.77 v1(605.51,709.45) 595,719.96 595,849.09 616,870.09 616,926 619.76,929.76 630.24,929.76 v1(630,930)
NetU5_19: U5.19 U6.5 U7.5 | length 995.6
  Top CMP/GND w8: v1(304,571) 305,571 U6.5@311,577 ; U7.5@320,950 330,940 v1(330,875)
  Top CMP/GND w10: U5.19 633.1,748.79 v1(637.8,744.09)
  Top SIG/PWR w8: v1(304,571) 303,572 303,834.09 330,861.09 v1(330,875)
  Bottom SIG/PWR w8: v1@335,870 355,870 371.02,853.98 563.28,853.98 565.01,855.72 565.44,855.72 567.16,854 592.84,854 594.56,855.72 694.54,855.72 732,818.25 732,771.75 704.35,744.09 v1(637.8,744.09)
NetU5_20: U5.20 U6.8 U7.8 | length 1144.1
  Top CMP/GND w7: U7.8 330,650 v1(340,640)
  Top CMP/GND w10: U5.20 637.48,768.47 v1(637.8,768.79)
  Top SIG/PWR w7: v1(288,277) 325,314 325,585.34 332,592.34 332,619.16 ; 332.16,619 340,626.84 v1(340,640) 340,662.46 334.12,668.34 334.12,819.12 v1(355,840)
  Bottom SIG/PWR w7: v1(355,840) 597.93,840 600.15,842.22 688.95,842.22 718.5,812.66 718.5,777.34 707.66,766.5 640.08,766.5 v1(637.8,768.79)
NetU5_23: U5.23 U6.1 | length 455.8
  Top CMP/GND w10: U5.23 621.85,828.79 622.78,829.72 684.72,829.72 690,824.43 v1(690,815) ; U6.1@721.76,577 759.88,615.12 v1(759.88,633.98)
  Top SIG/PWR w10: v1(690,815) 765,815 780,830 781.21,828.79 781.21,655.31 v1(759.88,633.98)
NetU5_24: U5.24 U6.10 | length 814.5
  Top CMP/GND w10: U6.10@511,277 538,277 536,275 531,280 536,285 v1(570,285) ; U5.24 634.61,847.21 670,882.6 v1(670,885)
  Top SIG/PWR w10: v1(570,285) 570,310 676.09,416.09 676.09,797.07 664.38,808.79 664.38,823.81 640,848.19 670,878.19 v1(670,885)
NRTC_INT: U2.11 Y2.2 | length 556.6
  Bottom SIG/PWR w6: v1(114.69,380.31) 114.69,439.94 57.31,497.31 57.31,712.08 v1(160,814.76)
  Bottom CMP/GND w6: v1(114.69,380.31) Y2.2 ; v1(160,814.76) U2.11
RST: C20.2 J3.1 R16.1 U2.29 | length 762.1
  Top CMP/GND w6: R16.1 v1(404.53,701.1)
  Top SIG/PWR w6: v1(404.53,701.1) v1@408.64,697
  Bottom CMP/GND w6: U2.29 324.52,678.64 345.17,658 347.46,658 353.46,652 366.08,652 ; C20.2 392.74,625.33 366.08,652 ; v1(824,928) 653.46,928 592.46,867 472,867 440,835 440,736.57 v1(404.53,701.1) 404.53,690.46 366.08,652
RX_FTDI: J1.2 U2.31 | length 911.6
  Top CMP/GND w6: v2(760,235) 760,230 770,220 J1.2
  Bottom SIG/PWR w8: v2(305,495) 321.82,495 384.82,432 511.97,432 523.19,443.22 537.27,443.22 545.49,435 725,435 751,409 751,357.13 760,348.13 v2(760,235)
  Bottom CMP/GND w8: v2(305,495) 305,543.13 285,563.13 285,590 305.25,610.25 305.25,635.46 305,635.46 U2.31@305,641.92
SPI_CLK: J2.5 J3.2 U2.17 | length 916.3
  Top CMP/GND w6: v1(795,850) 805,840 J3.2
  Bottom SIG/PWR w6: v1(282.2,892.8) 282.39,893 463.43,893 472,884.43 472,877.54 482.56,866.98 552.6,866.98 557.35,871.74 567.8,871.74 572.54,867 587.46,867 592.2,871.74 621.28,871.74 654.54,905 727.97,905 v1@788.99,843.99 ; v1(630,690) 668.64,690 745,766.36 745,800 v1@788.99,843.99 ; v1(795,850) v1@788.99,843.99
  Bottom CMP/GND w6: U2.17 v1(282.2,892.8) ; J2.5 625.08,685.08 v1(630,690)
SPI_CSN: J2.2 U2.14 | length 1269.8
  Bottom SIG/PWR w6: v1(200,858.28) 200,860.66 183.12,877.54 183.12,932.63 230.49,980 702.43,980 720,962.43 720,949.01 725.01,944 739.94,944 751.94,932 763,932 803,892 920.43,892 940,872.43 940,779.54 912.46,752 817,752 765,700 v1(760,700)
  Bottom CMP/GND w6: v1(200,858.28) U2.14 ; J2.2@760,673.19 v1(760,700)
TX_FTDI: J1.3 U2.30 | length 794
  Top CMP/GND w8: v2(770,365) ccw(c815,365) 815,320 J1.3
  Bottom SIG/PWR w8: v2(350,495) 350,486.62 390.62,446 506.17,446 517.39,457.22 543.07,457.22 551.29,449 741,449 770,420 v2(770,365)
  Bottom CMP/GND w8: U2.30 310.04,662.83 323,649.87 321,647.87 321,632.13 323,630.13 323,537.31 350.16,510.16 350.16,495.16 v2(350,495)
VBAT: B1.1 C13.1 C14.1 C15.1 R19.2 U3.A1 U4.A2 U4.A3 U4.B2 | length 78.8
  Bottom CMP/GND w10: U4.A3 190,275.85 R19.2
  other v1: 565,215 720,215 565,235 720,235
VCC3V3: A1.2 C1.1 C2.1 C3.1 C4.1 C5.1 C6.1 C9.1 C10.1 C11.1 C16.1 C17.1 C18.1 C19.1 C21.1 C22.1 J2.4 R14.2 R15.2 R16.2 R20.2 R22.2 R23.2 U1.8 U2.4 U2.6 U2.18 U2.20 U4.D1 U4.D2 U5.16 Y2.8 | length 948.2
  Top CMP/GND w6: R20.2@402.48,775 402.48,750.52 410.57,742.43 v1(417.46,742.43)
  Top CMP/GND w10: C2.1@269.45,218 v1(356,218) 356,181.84 363,174.84 A1.2 ; v1(417.46,742.43) 424.8,735.09 R16.2 ; U1.8 524.84,419.84 530.23,425.23 v1(530.23,426.22) ; U5.16 559.84,711.98 v1(560.75,711.07) ; v1(658,713) 669.02,713 C18.1 C19.1
  Top CMP/GND w20: v1(163.11,691.9) 202.95,731.75 C17.1 ; R15.2 R14.2 395,767.52 402.48,775 R22.2@402.48,797 ; v1(369.48,397) R23.2
  Top SIG/PWR w10: v1@530,425.99 v1(530.23,426.22) ; v1@560,710.31 v1(560.75,711.07)
  Bottom SIG/PWR w6: v1@161.21,690 v1(163.11,691.9)
  Bottom CMP/GND w6: v1(163.11,691.9) 163.11,698.11 171.48,706.48 U2.6 ; C11.1 v1(170,643.56) U2.4 ; v1(417.46,742.43) v1@418.63,741.27
  Bottom CMP/GND w10: U2.18 v1(306.93,864.01) C10.1 ; U2.20 336,837.4 336,851.71 359.29,875 v1@380,875 ; v1(658,713) 668.39,702.61 J2.4
  Bottom CMP/GND w12: Y2.8 v1(183.19,488.19) ; C22.1 190,481.38 v1(183.19,488.19) ; C21.1 190,495 v1(183.19,488.19)
  other v1: 85,265 65,275 45,285 25,300 380,873
VCC5VUSB: C12.1 J1.4 U3.A2 | length 534.4
  Top CMP/GND w20: v3(729,334) 729,369 780,420 J1.4
  Bottom SIG/PWR w25: v1(365,305) 396.11,305 403.61,312.5 677.02,312.5 700.02,335.5 727.5,335.5 v3(729,334)
pads on no net: B1.3 B1.4 J1.5 J2.1 J2.8 J2.9 J2.10 U2.1 U2.2 U2.9 U2.10 U2.12 U2.19 U2.22 U2.23 U2.24 U2.25 U2.26 U4.C3 U4.D3 Y2.3

## Polygon pours and split planes (outlines as drawn)
GND on Bottom CMP/GND "L1_GND" (solid, shelved, pour order 20): 75,80 153.54,230.97 159.92,254.28 148.54,254.28 45,95
NetL1_1 on Bottom CMP/GND "NETL1_1" (solid, shelved, pour order 25): 161.4,250.36 100,150 75,95 100,70 155,70 193,141 195,205 195,223.36 174.22,244.14
NetL1_2 on Bottom CMP/GND "NETL1_2" (solid, shelved, pour order 27): 14.06,153.52 25,130 70,115 154.81,199.81 154.81,250.86 152.85,250.86 136.87,266.84 130.02,260 105,260 45,260
VCC3V3 on Bottom CMP/GND "VCC3v3" (solid, shelved, pour order 19): 35,340 25,335 10,300 65,260 93.26,251.11 115,255 126,256 145,271.49 145,280 140,280 115,305 75,345 35,345
VBAT on Bottom CMP/GND "VBAT" (solid, shelved, pour order 13): 305,365 250.23,349.77 147.93,254.23 185,240 205,240 298,185 365,160 535,160 575,200 750,200 750,275 350,275
VCC5VUSB on Bottom CMP/GND "VCC5VUSB" (solid, shelved, pour order 15): 305,365 305,275 400,275 400,325 375,350 365,360 365,365
GND on Bottom CMP/GND "Bottom GND Pour" (solid, shelved, pour order 29): 0,0 0,1000 1000,1000 1000,0
VCC3V3 on Top CMP/GND "VCC_STM" (solid, shelved, pour order 23): 308,760 374.29,826.29 379,826.29 391.31,826.29 397.56,820.04 400.1,817.5 413.98,817.5 413.98,763.37 411.35,760.74
GND on Top CMP/GND "Top GND" (solid, shelved, pour order 31): 0,0 0,1000 1000,1000 1000,0 0,0
VCC3V3 on Top CMP/GND "VCC3V3" (solid, shelved, pour order 18): 515,415 515,468.12 520.94,474.06 521.88,475 560,475 560,464.34 566.6,457.74 570,454.34 570,385
VBAT on Bottom SIG/PWR "VBAT" (solid, shelved, pour order 12): 355,340 755,265 755,195 210,195 210,300 290,340 295,345 305,355 335,355 340,355
VCC3V3 on Bottom SIG/PWR "VCC3V3" (solid, shelved, pour order 16): 0,0 0,1000 1000,1000 1000,0 0,0
VCC3V3 on Top SIG/PWR "VCC3V3" (solid, shelved, pour order 17): 0,0 0,1000 1000,1000 1000,0

## Keep-outs
Keep-Out Layer:
  the board outline again, w1

## Text inside footprints (layer, text, board x,y; h text height)
U1: Mechanical 1 "RefDes2" at 480,410 h50